# Altium PCB staircase PCB1.PcbDoc
Units mm, origin at the board's own origin, x right, y up, seen from the top; angles counter-clockwise.
Board outline 126.7 x 65 mm, 2 copper layers (Top Layer, Bottom Layer); 78 components, 76 nets, 222 pads, 2 vias.
Unrouted connection lines stored in the file: 1.
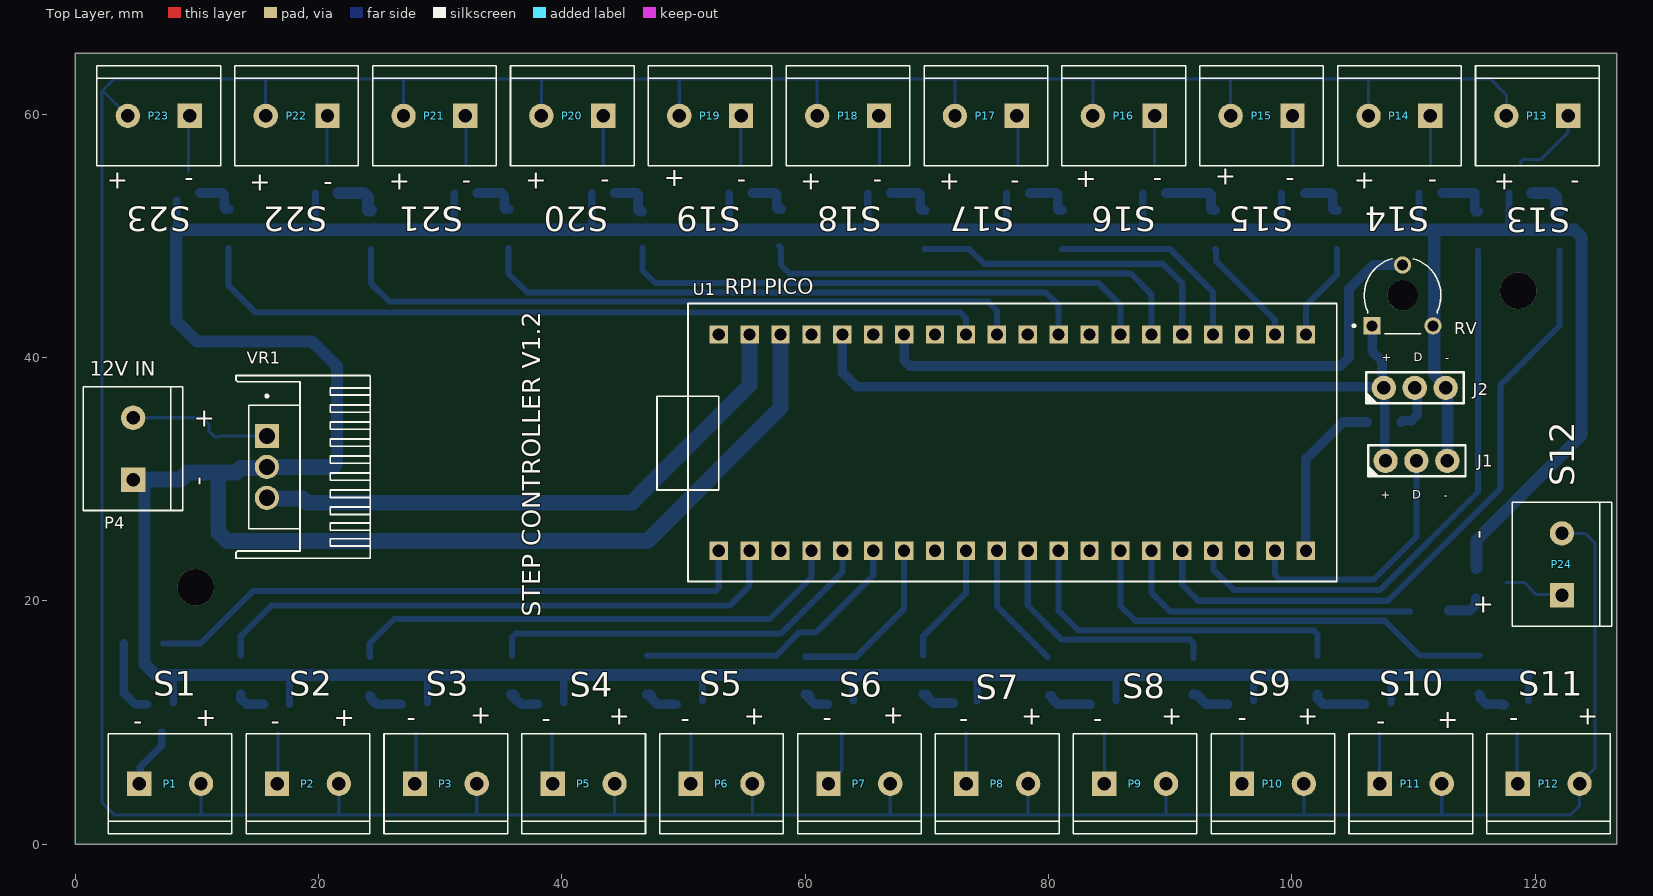
[diagram p0: Top Layer view]
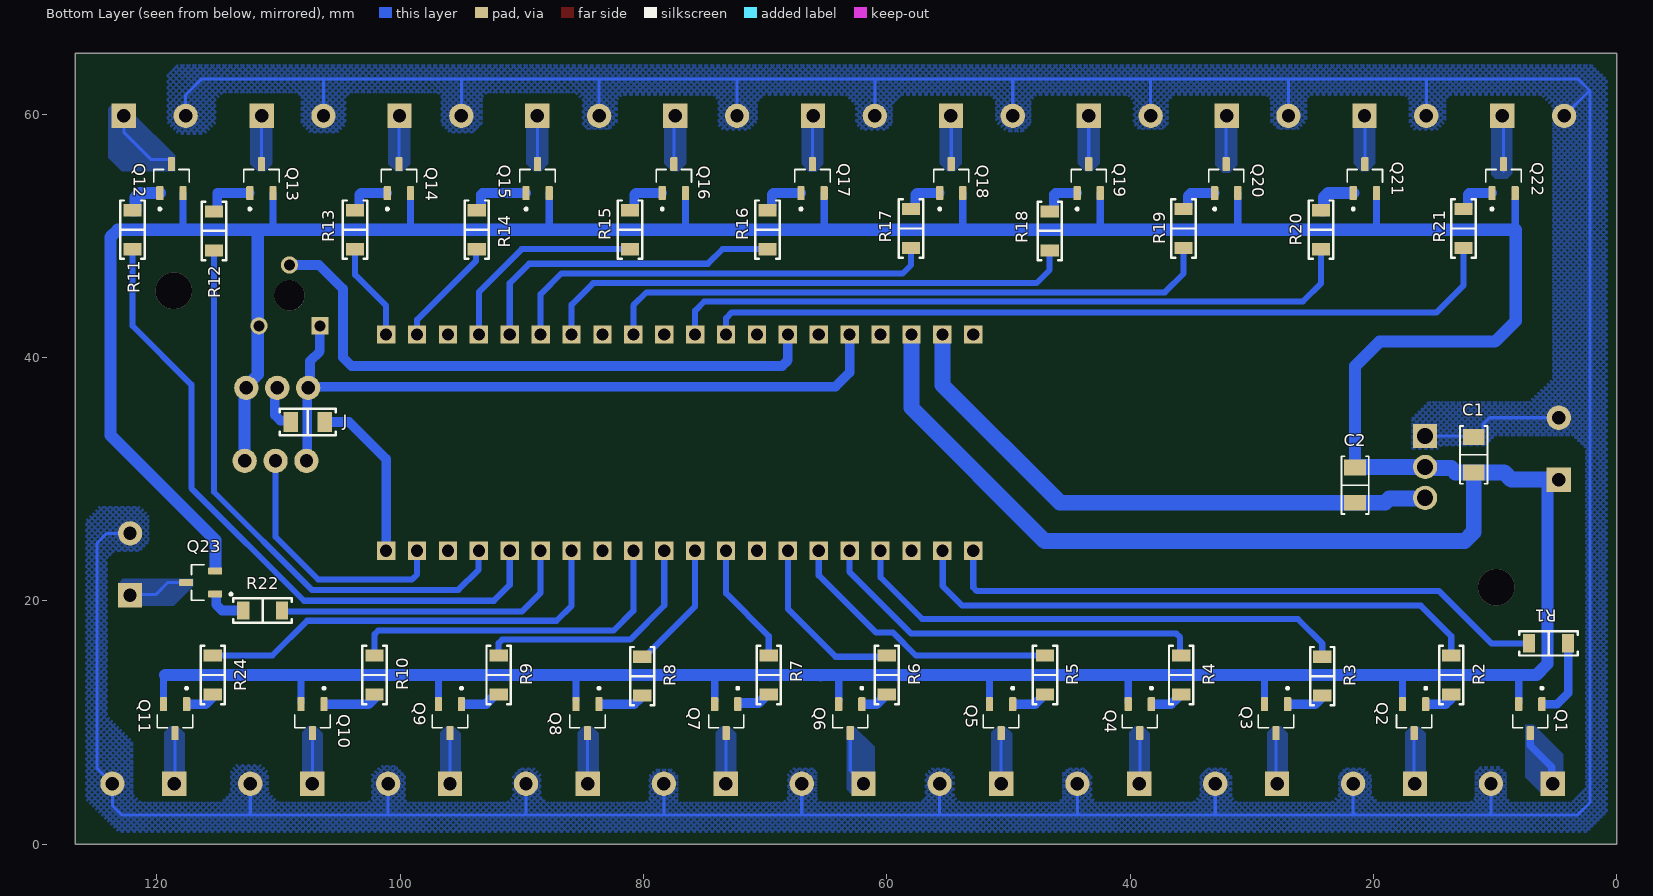
[diagram p1: Bottom Layer view, seen from below]
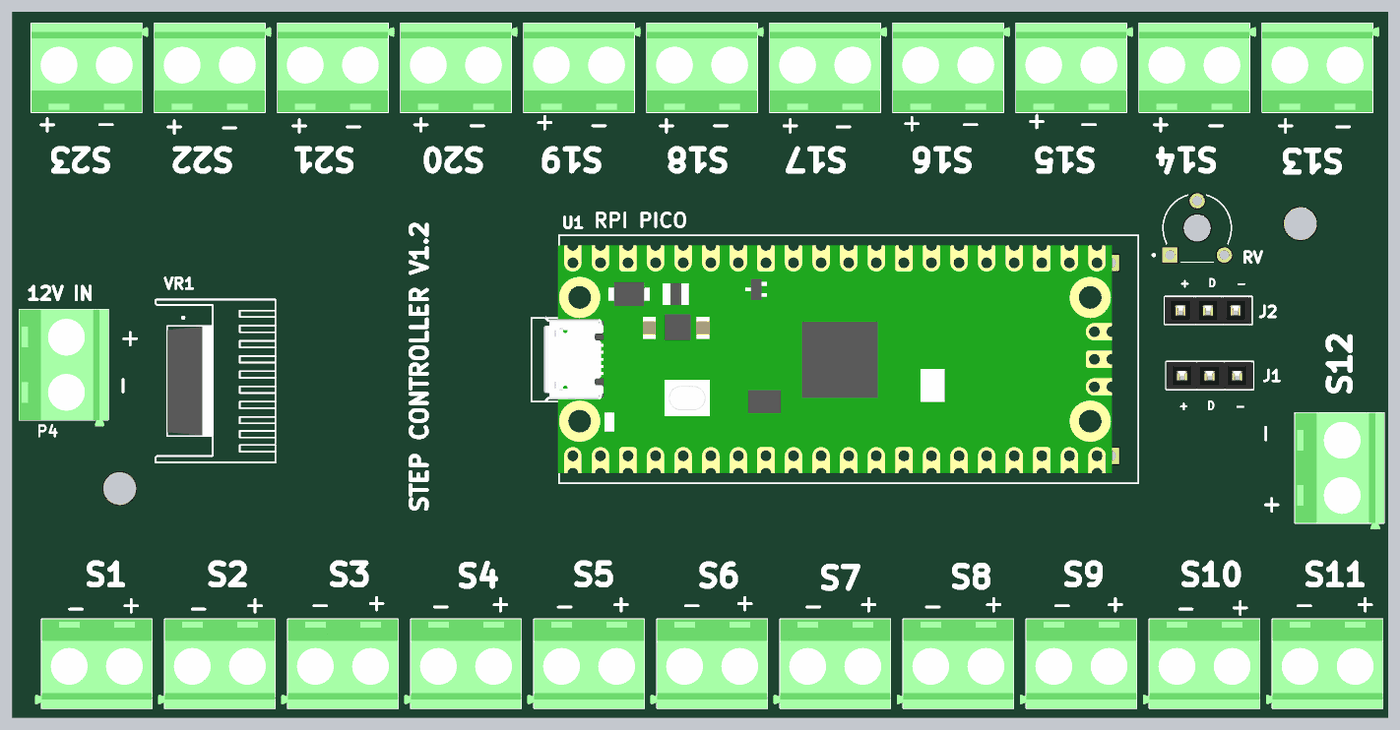
[diagram p2: 3D render of the assembled board from above, using the file's embedded part models]
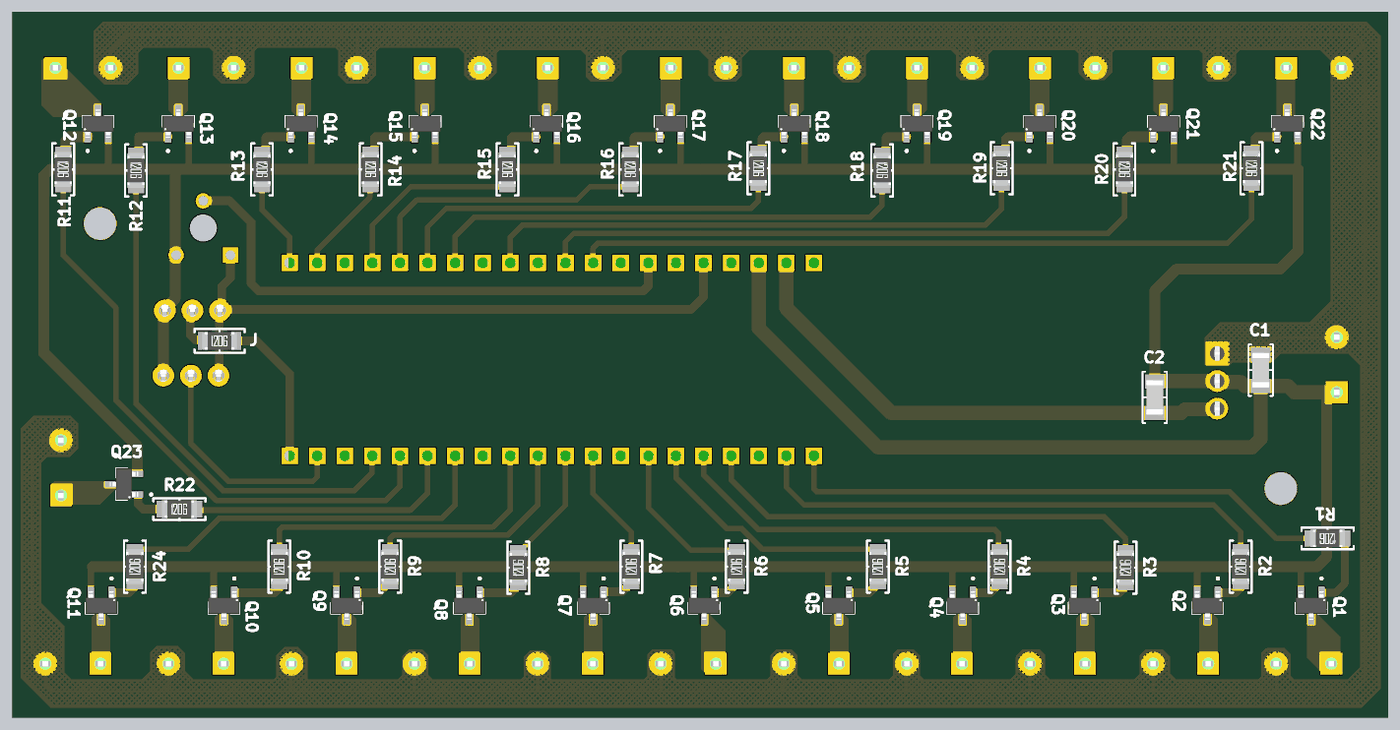
[diagram p3: 3D render of the assembled board from below, using the file's embedded part models]

## Layer stack, top to bottom
Top Solder: solder mask 0.0102, Solder Resist, Dk 3.5
Top Layer: signal copper 0.0356
Dielectric 1: dielectric 0.32, FR-4, Dk 4.8
Bottom Layer: signal copper 0.0356
Bottom Solder: solder mask 0.0102, Solder Resist, Dk 3.5

## Board outline
0,0 126.7,0 126.7,65 0,65

## Design rules (kind name [scope] priority, off if disabled: settings)
Clearance [All] p1: gap=0.254 ignorepadtopadclearanceinfootprint=FALSE except(0: Arc-Hole Track-Hole SMDPad-Hole THPad-Hole Via-Hole Fill-Hole Poly-Hole Region-Hole Text-Hole)
PolygonConnect [All] p1: connectstyle=Relief reliefconductorwidth=0.254 reliefentries=4 polygonreliefangle="90 Angle" airgapwidth=0.254
RoutingVias [All] p1: holewidth=0.711 width=1.27 viastyle="Through Hole" minholewidth=0.711 minwidth=1.27 maxholewidth=0.711 maxwidth=1.27
SolderMaskExpansion [All] p1: expansion=0.102 istentingtop=FALSE
Width [All] p1: maxlimit=10 minlimit=0.254 preferedwidth=0.254
30 further rules are at their usual default settings.

## Components (designator, comment, footprint, x,y, rotation, side; value= is the part's Value field where it differs from the comment)
C1 "0.33 µF" "CAP 1206_3216 - 0.8MM" 11.75,32 r90 bottom
C2 "100pF" "CAP 1206_3216 - 0.8MM" 21.5,29.5 r90 bottom
J "Comment" "RES 1206_3216" 107.6,34.7 r180 bottom
J1 "PIR SENS" "HARWIN M20-7820345" 110.24,31.5 r90 top
J2 "PIR SENS" "HARWIN M20-7820345" 110.1,37.5 r90 top
P1 "282837-2" TE_282837-2 7.793,4.959 r0 top
P2 "282837-2" TE_282837-2 19.125,4.959 r0 top
P3 "282837-2" TE_282837-2 30.456,4.959 r0 top
P4 "12V IN" TE_282837-2 4.75,32.5 r90 top
P5 "282837-2" TE_282837-2 41.788,4.959 r0 top
P6 "282837-2" TE_282837-2 53.119,4.959 r0 top
P7 "282837-2" TE_282837-2 64.451,4.959 r0 top
P8 "282837-2" TE_282837-2 75.782,4.959 r0 top
P9 "282837-2" TE_282837-2 87.114,4.959 r0 top
P10 "282837-2" TE_282837-2 98.445,4.959 r0 top
P11 "282837-2" TE_282837-2 109.777,4.959 r0 top
P12 "282837-2" TE_282837-2 121.108,4.959 r0 top
P13 "282837-2" TE_282837-2 120.173,59.859 r180 top
P14 "282837-2" TE_282837-2 108.842,59.859 r180 top
P15 "282837-2" TE_282837-2 97.51,59.859 r180 top
P16 "282837-2" TE_282837-2 86.179,59.859 r180 top
P17 "282837-2" TE_282837-2 74.847,59.859 r180 top
P18 "282837-2" TE_282837-2 63.516,59.859 r180 top
P19 "282837-2" TE_282837-2 52.184,59.859 r180 top
P20 "282837-2" TE_282837-2 40.853,59.859 r180 top
P21 "282837-2" TE_282837-2 29.521,59.859 r180 top
P22 "282837-2" TE_282837-2 18.19,59.859 r180 top
P23 "282837-2" TE_282837-2 6.858,59.859 r180 top
P24 "282837-2" TE_282837-2 122.2,23 r90 top
Q1 "AO3400-5.8A" SOT95P260X140-3N 7.1,10.31 r270 bottom
Q2 "AO3400-5.8A" SOT95P260X140-3N 16.65,10.31 r270 bottom
Q3 "AO3400-5.8A" SOT95P260X140-3N 28,10.31 r270 bottom
Q4 "AO3400-5.8A" SOT95P260X140-3N 39.2,10.31 r270 bottom
Q5 "AO3400-5.8A" SOT95P260X140-3N 50.6,10.31 r270 bottom
Q6 "AO3400-5.8A" SOT95P260X140-3N 63,10.31 r270 bottom
Q7 "AO3400-5.8A" SOT95P260X140-3N 73.2,10.31 r270 bottom
Q8 "AO3400-5.8A" SOT95P260X140-3N 84.6,10.31 r270 bottom
Q9 "AO3400-5.8A" SOT95P260X140-3N 95.9,10.31 r270 bottom
Q10 "AO3400-5.8A" SOT95P260X140-3N 107.2,10.31 r270 bottom
Q11 "AO3400-5.8A" SOT95P260X140-3N 118.5,10.31 r270 bottom
Q12 "AO3400-5.8A" SOT95P260X140-3N 118.8,54.7 r90 bottom
Q13 "AO3400-5.8A" SOT95P260X140-3N 111.4,54.7 r90 bottom
Q14 "AO3400-5.8A" SOT95P260X140-3N 100.1,54.7 r90 bottom
Q15 "AO3400-5.8A" SOT95P260X140-3N 88.7,54.7 r90 bottom
Q16 "AO3400-5.8A" SOT95P260X140-3N 77.5,54.7 r90 bottom
Q17 "AO3400-5.8A" SOT95P260X140-3N 66.1,54.7 r90 bottom
Q18 "AO3400-5.8A" SOT95P260X140-3N 54.7,54.7 r90 bottom
Q19 "AO3400-5.8A" SOT95P260X140-3N 43.4,54.7 r90 bottom
Q20 "AO3400-5.8A" SOT95P260X140-3N 32.1,54.7 r90 bottom
Q21 "AO3400-5.8A" SOT95P260X140-3N 20.7,54.7 r90 bottom
Q22 "AO3400-5.8A" SOT95P260X140-3N 9.3,54.7 r90 bottom
Q23 "AO3400-5.8A" SOT95P260X140-3N 116.4,21.5 r0 bottom
R1 "220 Ohms" "YAGEO RES 1206_3216" 5.6,16.5 r0 bottom
R2 "220 Ohms" "YAGEO RES 1206_3216" 13.6,13.9 r90 bottom
R3 "220 Ohms" "YAGEO RES 1206_3216" 24.2,13.8 r90 bottom
R4 "220 Ohms" "YAGEO RES 1206_3216" 35.8,13.9 r90 bottom
R5 "220 Ohms" "YAGEO RES 1206_3216" 47,13.9 r90 bottom
R6 "220 Ohms" "YAGEO RES 1206_3216" 60,13.9 r90 bottom
R7 "220 Ohms" "YAGEO RES 1206_3216" 69.7,13.9 r90 bottom
R8 "220 Ohms" "YAGEO RES 1206_3216" 80.1,13.8 r90 bottom
R9 "220 Ohms" "YAGEO RES 1206_3216" 91.9,13.9 r90 bottom
R10 "220 Ohms" "YAGEO RES 1206_3216" 102.1,13.9 r90 bottom
R11 "220 Ohms" "YAGEO RES 1206_3216" 122,50.5 r270 bottom
R12 "220 Ohms" "YAGEO RES 1206_3216" 115.3,50.4 r270 bottom
R13 "220 Ohms" "YAGEO RES 1206_3216" 103.7,50.5 r270 bottom
R14 "220 Ohms" "YAGEO RES 1206_3216" 93.7,50.5 r270 bottom
R15 "220 Ohms" "YAGEO RES 1206_3216" 81.1,50.5 r270 bottom
R16 "220 Ohms" "YAGEO RES 1206_3216" 69.8,50.5 r270 bottom
R17 "220 Ohms" "YAGEO RES 1206_3216" 58,50.6 r270 bottom
R18 "220 Ohms" "YAGEO RES 1206_3216" 46.6,50.4 r270 bottom
R19 "220 Ohms" "YAGEO RES 1206_3216" 35.6,50.6 r270 bottom
R20 "220 Ohms" "YAGEO RES 1206_3216" 24.3,50.5 r270 bottom
R21 "220 Ohms" "YAGEO RES 1206_3216" 12.6,50.6 r270 bottom
R22 "220 Ohms" "YAGEO RES 1206_3216" 111.3,19.2 r180 bottom
R24 "220 Ohms" "YAGEO RES 1206_3216" 115.4,13.9 r90 bottom
RV "10K" TRIM_PTN06-D02CB20 109.1,45.1 r0 top
U1 "RASPBERRY_PI_PICO" RASPBERRY_PI_PICO 75.75,33 r90 top
VR1 "L7805" TO255P1020X450X2000-3 15.75,31 r270 top

## Footprints (in the part's own frame and the unit in brackets; to place one, negate y for a bottom-side part, rotate by r counter-clockwise, add the part's x,y. Pads: shape width x height; smd on the part's side, far side on the other; paste and mask are expansions set on the pad)
"CAP 1206_3216 - 0.8MM" [mm] "Chip Capacitor, 2-Leads, Body 3.25x1.60mm, IPC Medium Density"
  rect 1.3x1.8 smd: 1(-1.45,0) 2(1.45,0)
  silkscreen extent -2.37,-1.13 2.38,1.12, body extent -1.6,-0.8 1.6,0.8, height 0.8
"HARWIN M20-7820345" [mm] "2.54mm DIL PC TAIL PIN HEADER ASSEMBLY"
  round 2 hole 1.1: 1(0,2.54) 2(0,0) 3(0,-2.54)
  silkscreen extent -1.27,-4.03 1.27,4, body extent -1.25,-4.01 1.25,4.01, height 8.5
RASPBERRY_PI_PICO [mm]
  rect 1.508x1.508 / inner round 1.508 / far side rect 1.508x1.508 hole 1: 3V3(8.89,12.7) 3V3_EN(8.89,15.24) ADC_VREF(8.89,10.16) AGND(8.89,5.08) GND(8.89,17.78) GND2(8.89,-7.62) GND3(8.89,-20.32) GND4(-8.89,17.78) GND5(-8.89,5.08) GND6(-8.89,-7.62) GND7(-8.89,-20.32) GP0(-8.89,22.86) GP1(-8.89,20.32) GP2(-8.89,15.24) GP3(-8.89,12.7) GP4(-8.89,10.16) GP5(-8.89,7.62) GP6(-8.89,2.54) GP7(-8.89,0) GP8(-8.89,-2.54) GP9(-8.89,-5.08) GP10(-8.89,-10.16) GP11(-8.89,-12.7) GP12(-8.89,-15.24) GP13(-8.89,-17.78) GP14(-8.89,-22.86) GP15(-8.89,-25.4) GP16(8.89,-25.4) GP17(8.89,-22.86) GP18(8.89,-17.78) GP19(8.89,-15.24) GP20(8.89,-12.7) GP21(8.89,-10.16) GP22(8.89,-5.08) GP26_A0(8.89,0) GP27_A1(8.89,2.54) GP28_A2(8.89,7.62) RUN(8.89,-2.54) VBUS(8.89,22.86) VSYS(8.89,20.32)
  silkscreen extent -11.43,-27.94 11.43,27.94, body extent -10.5,-25.5 10.5,26.8, height 3.73
"RES 1206_3216" [mm] "Chip Resistor, 2-Leads, Body 3.13x1.55mm, IPC Medium Density"
  rect 1.2x1.65 smd: 1(-1.4,0) 2(1.4,0)
  silkscreen extent -2.3,-1.1 2.3,1.1, body extent -1.6,-0.8 1.6,0.8, height 0.6
SOT95P260X140-3N [mm]
  rrect25% 1.14x0.6 smd: 1(-1.19,0.95) 2(-1.19,-0.95) 3(1.19,0)
  silkscreen extent -2.6,-1.45 0.75,1.45, body extent -1.3,-1.45 1.3,1.45, height 1.4
TE_282837-2 [mm]
  rect 2x2 hole 1.1: 1(-2.54,0)
  round 2 hole 1.1: 2(2.54,0)
  silkscreen extent -5.08,-4.1 5.08,4.1, body extent -5.68,-4.1 5.08,4.1, height 10
TO255P1020X450X2000-3 [mm]
  rect 1.995x1.995 hole 1.33: 1(-2.54,0)
  round 1.995 hole 1.33: 2(0,0) 3(2.54,0)
  silkscreen extent -7.53,-2.55 7.5,8.5, body extent -5.08,-1.47 5.08,2.72, height 22.86
TRIM_PTN06-D02CB20 [mm]
  rect 1.408x1.408 hole 0.9: 1(-2.5,-2.5)
  round 1.408 hole 0.9: 2(0,2.5) 3(2.5,-2.5)
  round 2.5 hole 2.5 unplated: ""(0,0)
  silkscreen extent -4.1,-3.15 3.15,3.03
"YAGEO RES 1206_3216" [mm] "Chip Resistor, 2-Leads, Body 3.13x1.55mm"
  rect 1x1.5 smd: 1(-1.6,0) 2(1.6,0)
  silkscreen extent -2.4,-1 2.4,1, body extent -1.6,-0.8 1.6,0.8, height 0.6

## Part data
C1: library part CC1206JKX7R8BB334, "CAP CER 0.33UF 25V X7R 1206", Device Package="1206 (3216 Metric)", Manufacturer=Yageo, Operating Temperature="-55°C ~ 125°C", Supplier Part Number 1=13-CC1206JKX7R8BB334CT-ND, Temperature Coefficient=X7R, Tolerance=±5%, Voltage - Rated=25V, Applications="General Purpose", Capacitance="0.33 µF", ComponentLink1Description=Datasheet, ComponentLink1URL=https://www.yageo.com/upload/media/product/app/datasheet/mlcc/upy-gphc_x7r_6_3v-to-250v.pdf, ComponentLink2Description="DigiKey Link", ComponentLink2URL=https://www.digikey.com/en/products/detail/yageo/CC1206JKX7R8BB334/5884429, Features="High Voltage", LastUpdated="04-06-2024 19:09:58", Lifecycle Status=Active, Minimum Order=1, Mounting Type="Surface Mount, MLCC", Package / Case="1206 (3216 Metric)", Packaging=TapeAndReel, Part Number=CC1206JKX7R8BB334, PartId=59979, Price=0.05, Series=CC, Size / Dimension="0.126\" L x 0.063\" W (3.20mm x 1.60mm)", Supplier 1=DigiKey, Thickness (Max)="0.037\" (0.95mm)"
C2: library part MM061A101JCT2A, "CAP CER 100PF 100V C0G/NP0 1206", Device Package="1206 (3216 Metric)", Manufacturer="AVX Corporation", Operating Temperature="-55°C ~ 125°C", Supplier Part Number 1=478-10622-1-ND, Temperature Coefficient="C0G, NP0", Tolerance=±5%, Voltage - Rated=100V, Applications="Medical, Non-Critical", Capacitance=100pF, ComponentLink1Description=Datasheet, ComponentLink1URL=http://datasheets.avx.com/AVX-MM.pdf, ComponentLink2Description="DigiKey Link", ComponentLink2URL=http://digikey.com/product-detail/en/avx-corporation/MM061A101JCT2A/478-10622-1-ND/7344883, LastUpdated="02-09-2020 01:04:46", Lifecycle Status=Active, Minimum Order=1, Mounting Type="Surface Mount, MLCC", Package / Case="1206 (3216 Metric)", Packaging=TapeAndReel, Part Number=MM061A101JCT2A, Part Status=Active, PartId=18685, Price=0.52, Series=MM, Size / Dimension="0.126\" L x 0.063\" W (3.20mm x 1.60mm)", Supplier 1=DigiKey, Thickness (Max)="0.029\" (0.74mm)"
J1 J2: library part M20-7820342, "CONN RCPT 3POS 0.1 GOLD PCB", Current Rating (Amps)=3A, Insulation Color=Black, Manufacturer="Harwin Inc.", Material Flammability Rating="UL94 V-0", Operating Temperature="-40°C ~ 105°C", Supplier Part Number 1=952-1783-ND, ComponentLink1Description=Datasheet, ComponentLink1URL=https://cdn.harwin.com/pdfs/Harwin_PC_Connectors_M20.pdf, ComponentLink2Description="DigiKey Link", ComponentLink2URL=https://www.digikey.com/en/products/detail/harwin-inc/M20-7820342/3727752, Connector Type=Receptacle, Contact Finish - Mating=Gold, Contact Finish - Post=Tin, Contact Finish Thickness - Mating=Flash, Contact Length - Post="0.118\" (3.00mm)", Contact Type="Female Socket", Fastening Type=Push-Pull, Insulation Height="0.335\" (8.51mm)", LastUpdated="21-09-2022 18:55:13", Lifecycle Status=Active, Mated Stacking Heights="11.04mm, 12.63mm", Minimum Order=1, Mounting Type="Through Hole", Number of Positions=3, Number of Positions Loaded=All, Number of Rows=1, Packaging=Tube, Part Number=M20-7820342, Part Status=Active, Pitch - Mating="0.100\" (2.54mm)", Price=0.42, Series=M20, Style="Board to Board or Cable", Supplier 1=DigiKey, Termination=Solder
P1 P2 P3 P5 P6 P7 P8 P9 P10 P11 P12 P13 P14 P15 P16 P17 P18 P19 P20 P21 P22 P23 P24: "Ð Ð°Ð·ÑŠÐµÐ¼Ð½Ñ‹Ðµ ÐºÐ»ÐµÐ¼Ð¼Ð½Ñ‹Ðµ ÐºÐ¾Ð»Ð¾Ð´ÐºÐ¸ Ð Ð¾Ð·ÐµÑ‚ÐºÐ° 2 Ð¿Ð¾Ð»Ð¾Ð¶ÐµÐ½Ð¸Ñ 5,08 Ð¼Ð¼ ÐŸÑ€Ð¸Ð¿Ð¾Ð¹ Ð¿Ñ€ÑÐ¼Ð¾Ð¹ Ñ‡ÐµÑ€ÐµÐ· Ð¾Ñ‚Ð²ÐµÑ€ÑÑ‚Ð¸Ðµ 13,5 Ð / ÐºÐ¾Ð½Ñ‚Ð°ÐºÑ‚", Package=None, Availability="In Stock", Check_prices=https://www.snapeda.com/parts/282837-2/TE+Connectivity+AMP+Connectors/view-part/?ref=eda, MF="TE Connectivity", MP=282837-2, Price=None, Purchase-URL=https://pricing.snapeda.com/search/part/282837-2/?ref=eda, SnapEDA_Link=https://www.snapeda.com/parts/282837-2/TE+Connectivity+AMP+Connectors/view-part/?ref=snap
P4: library part 282837-2, "Ð Ð°Ð·ÑŠÐµÐ¼Ð½Ñ‹Ðµ ÐºÐ»ÐµÐ¼Ð¼Ð½Ñ‹Ðµ ÐºÐ¾Ð»Ð¾Ð´ÐºÐ¸ Ð Ð¾Ð·ÐµÑ‚ÐºÐ° 2 Ð¿Ð¾Ð»Ð¾Ð¶ÐµÐ½Ð¸Ñ 5,08 Ð¼Ð¼ ÐŸÑ€Ð¸Ð¿Ð¾Ð¹ Ð¿Ñ€ÑÐ¼Ð¾Ð¹ Ñ‡ÐµÑ€ÐµÐ· Ð¾Ñ‚Ð²ÐµÑ€ÑÑ‚Ð¸Ðµ 13,5 Ð / ÐºÐ¾Ð½Ñ‚Ð°ÐºÑ‚", Package=None, Availability="In Stock", Check_prices=https://www.snapeda.com/parts/282837-2/TE+Connectivity+AMP+Connectors/view-part/?ref=eda, MF="TE Connectivity", MP=282837-2, Price=None, Purchase-URL=https://pricing.snapeda.com/search/part/282837-2/?ref=eda, SnapEDA_Link=https://www.snapeda.com/parts/282837-2/TE+Connectivity+AMP+Connectors/view-part/?ref=snap
Q1 Q2 Q3 Q4 Q5 Q6 Q7 Q8 Q9 Q10 Q11 Q12 Q13 Q14 Q15 Q16 Q17 Q18 Q19 Q20 Q21 Q22 Q23: "N-Channel 30 V 5.8A (Ta) 1.5W (Ta) Surface Mount SOT-23", Package=None, Availability="In Stock", Check_prices=https://www.snapeda.com/parts/AO3400-5.8A/MDD/view-part/?ref=eda, MF=MDD, MP=AO3400-5.8A, Price=None, Purchase-URL=https://pricing.snapeda.com/search/part/AO3400-5.8A/?ref=eda, SnapEDA_Link=https://www.snapeda.com/parts/AO3400-5.8A/MDD/view-part/?ref=snap
R1 R2 R3 R4 R5 R6 R7 R8 R9 R10 R11 R12 R13 R14 R15 R16 R17 R18 R19 R20 R21 R22 R24: library part AC1206JR-07220RL, "RES SMD 220 OHM 5% 1/4W 1206", Device Package="1206 (3216 Metric)", Manufacturer=Yageo, Operating Temperature="-55°C ~ 155°C", Power (Watts)="0.25W, 1/4W", Ratings=AEC-Q200, Supplier Device Package=1206, Supplier Part Number 1=YAG3937CT-ND, Temperature Coefficient=±100ppm/°C, Tolerance=±5%, ComponentLink1Description=Datasheet, ComponentLink1URL=https://www.yageo.com/upload/media/product/productsearch/datasheet/rchip/PYu-AC_51_RoHS_L_7.pdf, ComponentLink2Description="DigiKey Link", ComponentLink2URL=https://www.digikey.com/en/products/detail/yageo/AC1206JR-07220RL/5897808, Composition="Thick Film", Features="Automotive AEC-Q200, Moisture Resistant", Height - Seated (Max)="0.026\" (0.65mm)", LastUpdated="25-07-2024 09:21:37", Lifecycle Status=Active, Minimum Order=1, Number of Terminations=2, Package / Case="1206 (3216 Metric)", Packaging=TapeAndReel, Part Number=AC1206JR-07220RL, Part Status=Active, PartId=27518, Price=0.01, Resistance="220 Ohms", Series=AC, Size / Dimension="0.122\" L x 0.063\" W (3.10mm x 1.60mm)", Supplier 1=DigiKey
RV: library part PTN06-D02CB20, Package=None, Availability=Unavailable, MP=PTN06-D02CB20, Price=None
U1: "Raspberry Pi Board, Arm Cortex-M0+; Core Architecture:Arm; Core Sub-Architecture:Cortex-M0+; Kit Contents:Raspberry Pi Pico Board; No. Of Bits:32Bit; Silicon Core Number:Rp2040; Silicon Manufacturer:Raspberry Pi", Package=None, Check_prices=https://www.snapeda.com/parts/RASPBERRY%20PI%20PICO/Raspberry+Pi/view-part/?ref=eda, MF="Raspberry Pi", MP="RASPBERRY PI PICO", SnapEDA_Link=https://www.snapeda.com/parts/RASPBERRY%20PI%20PICO/Raspberry+Pi/view-part/?ref=snap
VR1: "Standard Regulator Pos 5V 1.5A 3-Pin(3+Tab) TO-220FP Tube", Package=None, Availability="Not in stock", Check_prices=https://www.snapeda.com/parts/L7805/STMicroelectronics/view-part/?ref=eda, MF=STMicroelectronics, MP=L7805, Price=None, SnapEDA_Link=https://www.snapeda.com/parts/L7805/STMicroelectronics/view-part/?ref=snap

## Via types
v1: diameter 3, hole 3, Top Layer to Bottom Layer, 2 vias

## Nets (pads, with @x,y where several pads share a name; then routed paths per layer and width w, separated by ;. In a path a pad name is that pad's centre, name@x,y a point inside that pad or via, vN(x,y) a via of type N, cw(c..) or ccw(c..) an arc to the next point about the centre after c; other vN are vias at no path point)
3V3: J1.1 J2.1 RV.1 U1.3V3 | length 59.6
  Bottom Layer w0.8: U1.3V3 63.05,38.75 64.2,37.6 J2.1@107.46,37.6 ; RV.1 106.6,40.5 107.4,39.7 107.4,37.66 J2.1@107.46,37.6 ; J1.1 107.63,31.57 107.63,37.43 J2.1 J2.1@107.46,37.6
GND: C1.1 C2.2 J1.3 J2.3 P4.1 Q1.2 Q2.2 Q3.2 Q4.2 Q5.2 Q6.2 Q7.2 Q8.2 Q9.2 Q10.2 Q11.2 Q12.2 Q13.2 Q14.2 Q15.2 Q16.2 Q17.2 Q18.2 Q19.2 Q20.2 Q21.2 Q22.2 Q23.2 RV.3 U1.GND VR1.2 | length 464.9
  Bottom Layer w0.5: 19.7,50.5 19.75,50.55
  Bottom Layer w0.6: 8,13.9 8.05,13.85 Q1.2@8.05,11.59 ; 8.3,50.5 8.35,50.55 8.35,52.91 ; 17.3,13.9 17.6,13.6 Q2.2 ; 18.7,13.9 18.75,13.85 ; 19.75,50.55 Q21.2 ; 20.45,50.55 20.5,50.5 ; 28.8,13.9 28.95,13.75 Q3.2@28.95,11.59 ; 30.4,13.9 30.55,13.75 ; 31.1,50.5 31.15,50.55 Q20.2 ; 32.1,50.5 32.2,50.6 ; 40.1,13.9 40.15,13.85 Q4.2@40.15,11.59 ; 42.25,13.85 42.3,13.9 ; 42.4,50.5 42.45,50.55 Q19.2 ; Q5.2@51.55,11.79 51.55,13.75 51.7,13.9 ; 53.7,50.496 53.75,50.546 Q18.2 ; 53.75,13.85 53.8,13.9 ; 55.15,50.546 55.2,50.496 ; 63.9,13.9 63.95,13.85 Q6.2@63.95,11.79 ; 65.1,50.496 65.15,50.546 Q17.2 ; 65.45,13.65 65.7,13.9 ; 66.9,50.496 66.95,50.546 ; Q7.2@74.15,11.79 74.15,13.85 74.2,13.9 ; 76.4,13.9 76.55,13.75 ; 76.5,50.496 76.55,50.546 Q16.2 ; 78,50.496 78.15,50.646 ; 85.5,13.9 85.55,13.85 Q8.2@85.55,11.79 ; Q15.2 87.75,50.746 88,50.496 ; 87.95,13.85 88,13.9 ; 90.6,50.496 90.65,50.546 ; 96.8,13.9 96.85,13.85 Q9.2@96.85,11.79 ; Q14.2 99.15,50.546 99.2,50.496 ; 100.7,13.9 100.75,13.85 ; 102.4,50.496 102.45,50.546 ; Q10.2@108.15,11.59 108.15,13.85 108.2,13.9 ; Q13.2 110.45,50.646 110.6,50.496 ; 111.55,13.85 111.6,13.9 ; 113.596,50.496 113.746,50.646 ; 117.8,50.496 117.85,50.546 Q12.2 ; 119.3,13.9 119.45,13.75 Q11.2@119.45,11.79 ; 123.1,50.496 123.15,50.546
  Bottom Layer w0.8: P4.1@5.7,29.66 6,29.96 ; C2.2@21.2,31 21.3,31 C2.2@21.5,31.2 ; 21.9,13.9 22.015,13.785 ; 48.668,50.5 48.672,50.496 ; 115.4,13.9 115.467,13.833
  Bottom Layer w1: P4.1@5.7,29.66 5.7,14.8 6.6,13.9 8,13.9 17.3,13.9 18.7,13.9 21.9,13.9 28.8,13.9 30.4,13.9 40.1,13.9 42.3,13.9 51.7,13.9 53.8,13.9 63.9,13.9 65.7,13.9 74.2,13.9 76.4,13.9 85.5,13.9 88,13.9 96.8,13.9 100.7,13.9 108.2,13.9 111.6,13.9 115.4,13.9 119.3,13.9 ; C2.2@21.5,31.2 21.5,39.3 19.5,41.3 10,41.3 8.3,43 8.3,50.5 19.7,50.5 20.5,50.5 31.1,50.5 32.1,50.5 42.4,50.5 48.668,50.5 ; 48.672,50.496 53.7,50.496 55.2,50.496 65.1,50.496 66.9,50.496 76.5,50.496 78,50.496 88,50.496 90.6,50.496 99.2,50.496 102.4,50.496 110.6,50.496 111.7,50.496 ; J2.3 112.64,37.646 111.7,38.586 111.7,42.212 111.678,42.233 111.678,42.578 111.7,42.6 111.678,42.622 111.678,42.967 111.7,42.988 111.7,50.496 ; J1.3 J2.3@112.78,37.5 ; Q23.2@115.18,22.7 115.18,24.98 123.8,33.6 123.8,49.91 123.214,50.496 123.1,50.496 117.8,50.496 113.596,50.496 111.7,50.496
  Bottom Layer w1.3: P4.1 6,29.96 8.66,29.96 9.25,30.55 C1.1 ; C2.2@21.2,31 VR1.2 15.65,30.9 13.6,30.9 13.25,30.55 C1.1 ; U1.GND 57.97,35.87 47,24.9 12.512,24.9 11.75,25.662 C1.1
L1: R1.2 U1.GP0 | length 50.6
  Bottom Layer w0.5: R1.2 10.3,16.5 14.6,20.8 52.597,20.8 52.89,21.093 U1.GP0
L2: R2.2 U1.GP1 | length 48
  Bottom Layer w0.5: R2.2 13.6,17.1 16.1,19.6 53.8,19.6 55.4,21.2 55.4,24.08 U1.GP1
L3: R3.2 U1.GP2 | length 41.9
  Bottom Layer w0.5: R3.2 24.2,16.5 26.2,18.5 57.1,18.5 60.51,21.91 U1.GP2
L4: R4.2 U1.GP3 | length 32.6
  Bottom Layer w0.5: R4.2@35.885,15.5 35.885,16.985 36.2,17.3 58,17.3 63.05,22.35 U1.GP3
L5: R5.2 U1.GP4 | length 23.3
  Bottom Layer w0.5: R5.2 57.6,15.5 59.5,17.4 60.9,17.4 65.59,22.09 U1.GP4
L6: R6.2 U1.GP5 | length 14.5
  Bottom Layer w0.5: R6.2@60,15.4 64.2,15.4 68.13,19.33 U1.GP5
L7: R7.2 U1.GP6 | length 10.1
  Bottom Layer w0.5: R7.2 69.7,17.1 73.21,20.61 U1.GP6
L8: R8.2 U1.GP7 | length 10.4
  Bottom Layer w0.5: U1.GP7 75.75,19.55 R8.2@79.9,15.4
L9: R9.2 U1.GP8 | length 20.6
  Bottom Layer w0.5: U1.GP8 78.29,19.61 81.1,16.8 91.607,16.8 91.9,16.507 R9.2 R9.2@91.9,15.301
L10: R10.2 U1.GP9 | length 28.8
  Bottom Layer w0.5: U1.GP9 80.83,19.17 82.446,17.554 101.807,17.554 102.1,17.261 R10.2 R10.2@102.1,15.447
L11: R24.2 U1.GP10 | length 35.7
  Bottom Layer w0.5: U1.GP10 85.91,19.59 87.146,18.354 89.68,18.354 107.646,18.354 110.5,15.5 R24.2
L12: R22.2 U1.GP11 | length 25.3
  Bottom Layer w0.5: U1.GP11 88.45,20.65 89.992,19.108 R22.2@109.7,19.108
L13: R11.2 U1.GP12 | length 54.9
  Bottom Layer w0.5: U1.GP12 90.99,21.31 92.3,20 107.9,20 117.154,29.254 117.154,37.754 122,42.6 R11.2@122,48.801
L14: R13.2 U1.GP16 | length 8.1
  Bottom Layer w0.5: U1.GP16 101.15,44.25 103.7,46.8 R13.2
L15: R14.2 U1.GP17 | length 9
  Bottom Layer w0.5: R14.2 93.757,48.843 93.757,47.943 98.599,43.101 98.599,41.901 U1.GP17
L16: R15.2 U1.GP18 | length 17.4
  Bottom Layer w0.5: R15.2 90,48.9 93.53,45.37 U1.GP18
L17: R16.2 U1.GP19 | length 26.6
  Bottom Layer w0.5: R16.2 73.5,48.9 74.7,47.7 89.4,47.7 90.99,46.11 U1.GP19
L18: R17.2 U1.GP20 | length 36.4
  Bottom Layer w0.5: R17.2@57.828,49.172 57.938,49.055 ccw(c58.302,49.399) R17.2 58,47.6 58.7,46.9 86.75,46.9 88.45,45.2 U1.GP20
L19: R18.2 U1.GP21 | length 44.8
  Bottom Layer w0.5: R18.2@46.613,49.037 46.613,47.187 47.692,46.108 84.142,46.108 85.91,44.34 U1.GP21
L20: R19.2 U1.GP22 | length 50.8
  Bottom Layer w0.5: R19.2 35.6,46.9 37.146,45.354 79.75,45.354 80.83,44.274 U1.GP22
L21: R20.2 U1.GP26_A0 | length 57.1
  Bottom Layer w0.5: R20.2 24.3,46.1 25.8,44.6 75,44.6 75.75,43.85 U1.GP26_A0
L22: R21.2 U1.GP27_A1 | length 66.2
  Bottom Layer w0.5: R21.2 12.6,45.9 14.8,43.7 72.75,43.7 73.21,43.24 U1.GP27_A1
L23: R12.2 U1.GP13 | length 47.2
  Bottom Layer w0.5: U1.GP13 93.575,24.065 93.575,22.525 95.204,20.896 107.257,20.896 115.3,28.939 R12.2
NetC1_2: C1.2 P1.2 P2.2 P3.2 P4.2 P5.2 P6.2 P7.2 P8.2 P9.2 P10.2 P11.2 P12.2 P13.2 P14.2 P15.2 P16.2 P17.2 P18.2 P19.2 P20.2 P21.2 P22.2 P23.2 P24.2 VR1.1 | length 392.5
  Bottom Layer w0.254: P23.2 2.277,61.9 2.2,61.9 ; P4.2 10.46,35.04 10.977,34.523 10.977,33.973 11.5,33.45 C1.2 11.84,33.54 VR1.1 ; P1.2 10.333,2.567 10.5,2.4 ; P22.2 15.65,62.85 15.6,62.9 ; P2.2 21.665,2.565 21.5,2.4 ; P21.2 26.981,62.781 27.1,62.9 ; P3.2 32.996,2.496 32.9,2.4 ; P20.2 38.313,62.813 38.4,62.9 ; P5.2 44.328,2.528 44.2,2.4 ; P19.2 49.644,62.844 49.7,62.9 ; P6.2 55.659,2.441 55.7,2.4 ; P18.2 60.976,62.824 60.9,62.9 ; P7.2 66.991,2.509 67.1,2.4 ; P17.2 72.307,62.893 72.3,62.9 ; P8.2 78.322,2.422 78.3,2.4 ; P16.2 83.639,62.761 83.5,62.9 ; P9.2 89.654,2.546 89.8,2.4 ; P15.2 94.97,62.87 95,62.9 ; P10.2 100.985,2.415 101,2.4 ; P14.2 106.302,62.898 106.3,62.9 ; P11.2 112.317,2.483 112.4,2.4 ; P13.2 117.633,61.567 116.3,62.9 106.3,62.9 ; P24.2 124.111,25.54 124.9,24.751 124.9,6.211 P12.2 123.648,3.148 122.9,2.4 112.4,2.4 ; 2.2,61.9 2.2,3.4 3.2,2.4 10.5,2.4 ; 2.2,61.9 3.2,62.9 15.6,62.9 ; 10.5,2.4 21.5,2.4 ; 15.6,62.9 26.981,62.9 27.1,62.9 ; 21.5,2.4 32.9,2.4 ; 27.1,62.9 38.4,62.9 ; 32.9,2.4 32.996,2.4 44.2,2.4 ; 38.4,62.9 49.7,62.9 ; 44.2,2.4 55.7,2.4 ; 49.7,62.9 60.9,62.9 ; 55.7,2.4 66.991,2.4 67.1,2.4 ; 60.9,62.9 72.3,62.9 ; 67.1,2.4 78.3,2.4 ; 72.3,62.9 83.5,62.9 ; 78.3,2.4 89.8,2.4 ; 83.5,62.9 95,62.9 ; 89.8,2.4 101,2.4 ; 95,62.9 106.3,62.9 ; 101,2.4 112.4,2.4
NetC2_1: C2.1 U1.VSYS VR1.3 | length 48
  Bottom Layer w1.3: VR1.3 15.808,28.403 18.698,28.403 19.05,28.05 C2.1 45.75,28.05 55.43,37.73 U1.VSYS
NetJ1_2: J1.2 U1.GP14 | length 21.5
  Bottom Layer w0.5: U1.GP14 98.61,22.16 99.02,21.75 106.75,21.75 110.24,25.24 J1.2
NetJ2_2: J2.2 J.1 J.2 U1.GP15 | length 17.7
  Bottom Layer w0.8: U1.GP15 101.15,31.65 104.2,34.7 J.2 ; J.1 109.1,34.8 109.831,34.8 110.3,35.269 110.3,37.3 J2.2
NetP1_1: P1.1 Q1.3 | length 5
  Bottom Layer w0.6: P1.1 5.332,5.038 5.332,6.332 7.1,8.1 Q1.3@7.1,9.21
NetP2_1: P2.1 Q2.3 | length 4.2
  Bottom Layer w0.254: P2.1 16.65,5.024 Q2.3
NetP3_1: P3.1 Q3.3 | length 4.2
  Bottom Layer w0.254: P3.1 28,5.043 Q3.3
NetP5_1: P5.1 Q4.3 | length 4.2
  Bottom Layer w0.254: Q4.3 39.2,5.007 P5.1
NetP6_1: P6.1 Q5.3 | length 4.2
  Bottom Layer w0.254: P6.1 50.6,4.98 Q5.3
NetP7_1: P7.1 Q6.3 | length 4.6
  Bottom Layer w0.254: P7.1 63,6.048 Q6.3
NetP8_1: P8.1 Q7.3 | length 4.2
  Bottom Layer w0.254: Q7.3 73.2,5.001 P8.1
NetP9_1: P9.1 Q8.3 | length 4.2
  Bottom Layer w0.254: P9.1 84.6,4.985 Q8.3
NetP10_1: P10.1 Q9.3 | length 4.2
  Bottom Layer w0.254: Q9.3 95.9,4.964 P10.1
NetP11_1: P11.1 Q10.3 | length 4.2
  Bottom Layer w0.254: Q10.3 107.2,4.996 P11.1
NetP12_1: P12.1 Q11.3 | length 4.2
  Bottom Layer w0.254: Q11.3 118.5,5.027 P12.1
NetP13_1: P13.1 Q12.3 | length 6.5
  Bottom Layer w0.254: Q12.3 118.8,56.085 118.973,56.258 120.458,56.258 122.713,58.513 P13.1
NetP14_1: P14.1 Q13.3 | length 4
  Bottom Layer w0.254: P14.1 111.4,59.841 Q13.3
NetP15_1: P15.1 Q14.3 | length 4
  Bottom Layer w0.254: P15.1 100.1,59.809 Q14.3
NetP16_1: P16.1 Q15.3 | length 4
  Bottom Layer w0.254: Q15.3 88.7,59.84 P16.1
NetP17_1: P17.1 Q16.3 | length 4
  Bottom Layer w0.254: P17.1 77.5,59.746 Q16.3
NetP18_1: P18.1 Q17.3 | length 4
  Bottom Layer w0.254: P18.1 66.1,59.815 Q17.3
NetP19_1: P19.1 Q18.3 | length 4
  Bottom Layer w0.254: Q18.3 54.7,59.835 P19.1
NetP20_1: P20.1 Q19.3 | length 4
  Bottom Layer w0.254: P20.1 43.4,59.852 Q19.3
NetP21_1: P21.1 Q20.3 | length 4
  Bottom Layer w0.254: P21.1 32.1,59.82 Q20.3
NetP22_1: P22.1 Q21.3 | length 4
  Bottom Layer w0.254: Q21.3 20.7,59.829 P22.1
NetP23_1: P23.1 Q22.3 | length 4.6
  Bottom Layer w0.254: 9.3,55.29 9.3,59.761 P23.1
NetP24_1: P24.1 Q23.3 | length 5
  Bottom Layer w0.254: Q23.3 119.1,21.5 120.1,20.5 122.16,20.5 P24.1
NetQ1_1: Q1.1 R1.1 | length 6.4
  Bottom Layer w0.7: R1.1 4,13.4 4,12.4 4.9,11.5 Q1.1@5.9,11.5
NetQ2_1: Q2.1 R2.1 | length 2.4
  Bottom Layer w0.8: R2.1 13.6,11.969 14.069,11.5 Q2.1@15.5,11.5
NetQ3_1: Q3.1 R3.1 | length 3
  Bottom Layer w0.8: R3.1 24.3,12.1 24.3,11.969 24.769,11.5 Q3.1@26.8,11.5
NetQ4_1: Q4.1 R4.1 | length 2.7
  Bottom Layer w0.8: R4.1 36.05,12.3 36.15,12.2 36.15,11.969 36.619,11.5 Q4.1@38,11.5
NetQ5_1: Q5.1 R5.1 | length 2.9
  Bottom Layer w0.8: R5.1 47.25,12.3 47.35,12.2 47.35,11.969 47.819,11.5 Q5.1@49.4,11.5
NetQ6_1: Q6.1 R6.1 | length 2.3
  Bottom Layer w0.8: R6.1 60.25,12.3 60.35,12.2 60.35,11.969 60.819,11.5 Q6.1@61.8,11.5
NetQ7_1: Q7.1 R7.1 | length 2.8
  Bottom Layer w0.8: R7.1 69.95,12.3 70.05,12.2 70.05,12.069 70.519,11.6 Q7.1@72.15,11.6
NetQ8_1: Q8.1 R8.1 | length 3.7
  Bottom Layer w0.8: R8.1 80.2,12.2 80.3,12.1 80.3,11.969 80.769,11.5 Q8.1@83.4,11.5
NetQ9_1: Q9.1 R9.1 | length 3.1
  Bottom Layer w0.8: R9.1 92.15,12.3 92.95,11.5 Q9.1@94.7,11.5
NetQ10_1: Q10.1 R10.1 | length 4.4
  Bottom Layer w0.8: R10.1 102.1,11.969 102.569,11.5 Q10.1@106,11.5
NetQ11_1: Q11.1 R24.1 | length 2.5
  Bottom Layer w0.8: R24.1 115.5,12.2 115.5,11.969 115.969,11.5 117.382,11.5 Q11.1@117.442,11.44
NetQ12_1: Q12.1 R11.1 | length 3.4
  Bottom Layer w1: Q12.1 121.39,53.51 121.75,53.15 121.75,52.1 R11.1
NetQ13_1: Q13.1 R12.1 | length 4.4
  Bottom Layer w0.8: Q13.1 115.031,53.51 115.031,52.1 115.131,52 R12.1
NetQ14_1: Q14.1 R13.1 | length 3.9
  Bottom Layer w0.8: Q14.1 103.231,53.51 103.35,53.391 103.35,52.2 103.45,52.1 R13.1
NetQ15_1: Q15.1 R14.1 | length 5.3
  Bottom Layer w0.8: Q15.1 93.231,53.51 93.35,53.391 93.35,52.2 93.45,52.1 R14.1
NetQ16_1: Q16.1 R15.1 | length 3.9
  Bottom Layer w0.8: Q16.1 80.631,53.51 80.75,53.391 80.75,52.2 80.85,52.1 R15.1
NetQ17_1: Q17.1 R16.1 | length 4
  Bottom Layer w0.8: Q17.1 69.331,53.51 69.45,53.391 69.45,52.2 69.55,52.1 R16.1
NetQ18_1: Q18.1 R17.1 | length 3.5
  Bottom Layer w0.8: Q18.1 57.531,53.51 57.65,53.391 57.65,52.3 57.75,52.2 R17.1
NetQ19_1: Q19.1 R18.1 | length 3.6
  Bottom Layer w0.8: Q19.1 46.131,53.51 46.25,53.391 46.25,52.1 46.35,52 R18.1
NetQ20_1: Q20.1 R19.1 | length 3.7
  Bottom Layer w0.8: Q20.1 35.031,53.51 35.25,53.291 35.25,52.3 35.35,52.2 R19.1
NetQ21_1: Q21.1 R20.1 | length 3.9
  Bottom Layer w1: Q21.1 23.714,53.51 24.05,53.174 24.05,52.1 R20.1
NetQ22_1: Q22.1 R21.1 | length 3.5
  Bottom Layer w0.8: Q22.1 12.131,53.51 12.25,53.391 12.25,52.3 12.35,52.2 R21.1
NetQ23_1: Q23.1 R22.1 | length 2.9
  Bottom Layer w0.8: R22.1 114.641,19.2 115.11,19.669 115.11,20.2
NetRV_2: RV.2 U1.GP28_A2 | length 50
  Bottom Layer w0.8: U1.GP28_A2 68.13,39.769 68.599,39.3 104,39.3 104.7,40 104.7,45.637 106.663,47.6 RV.2
pads on no net: RV. U1.3V3_EN U1.ADC_VREF U1.AGND U1.GND2 U1.GND3 U1.GND4 U1.GND5 U1.GND6 U1.GND7 U1.RUN U1.VBUS
copper on no net:
  other v1: 9.9,21.1 118.6,45.5

## Polygon pours and split planes (outlines as drawn)
NetC1_2 on Bottom Layer "NETC1_2_L02_P069" (hatched 45Degree grid 0.35 track 0.203, pour order 69): 194 vertices, not listed, extent 0.8,1 125.8,64
NetP24_1 on Bottom Layer "NETP24_1_L02_P068" (solid, pour order 68): 117,21.2 117,21.8 122.8,21.8 123.1,21.5 123.1,19.6 118.6,19.6
NetP7_1 on Bottom Layer "NETP7_1_L02_P067" (solid, pour order 67): 62.7,9.7 63.3,9.7 63.3,4.5 62.9,4.1 61,4.1 61,8
NetP12_1 on Bottom Layer "NETP12_1_L02_P066" (solid, pour order 66): 117.684,4.1 119.384,4.1 119.384,9.2 118.884,9.7 118.284,9.7 117.684,9.1
NetP11_1 on Bottom Layer "NETP11_1_L02_P065" (solid, pour order 65): 106.352,4.1 108.052,4.1 108.052,9.2 107.552,9.7 106.952,9.7 106.352,9.1
NetP10_1 on Bottom Layer "NETP10_1_L02_P064" (solid, pour order 64): 95.021,4.1 96.721,4.1 96.721,9.2 96.221,9.7 95.621,9.7 95.021,9.1
NetP9_1 on Bottom Layer "NETP9_1_L02_P063" (solid, pour order 63): 83.689,4.1 85.389,4.1 85.389,9.2 84.889,9.7 84.289,9.7 83.689,9.1
NetP8_1 on Bottom Layer "NETP8_1_L02_P062" (solid, pour order 62): 72.358,4.1 74.058,4.1 74.058,9.2 73.558,9.7 72.958,9.7 72.358,9.1
NetP6_1 on Bottom Layer "NETP6_1_L02_P061" (solid, pour order 61): 49.694,4.1 51.394,4.1 51.394,9.2 50.894,9.7 50.294,9.7 49.694,9.1
NetP5_1 on Bottom Layer "NETP5_1_L02_P060" (solid, pour order 60): 38.363,4.1 40.063,4.1 40.063,9.2 39.563,9.7 38.963,9.7 38.363,9.1
NetP3_1 on Bottom Layer "NETP3_1_L02_P059" (solid, pour order 59): 27.032,4.1 28.732,4.1 28.732,9.2 28.232,9.7 27.632,9.7 27.032,9.1
NetP2_1 on Bottom Layer "NETP2_1_L02_P058" (solid, pour order 58): 15.7,4.1 17.4,4.1 17.4,9.2 16.9,9.7 16.3,9.7 15.7,9.1
NetP22_1 on Bottom Layer "NETP22_1_L02_P057" (solid, pour order 57): 21.03,55.318 21.63,55.918 21.63,60.718 19.83,60.718 19.83,55.918 20.43,55.318
NetP21_1 on Bottom Layer "NETP21_1_L02_P056" (solid, pour order 56): 32.388,55.196 32.988,55.796 32.988,60.596 31.188,60.596 31.188,55.796 31.788,55.196
NetP20_1 on Bottom Layer "NETP20_1_L02_P055" (solid, pour order 55): 43.7,55.311 44.3,55.911 44.3,60.711 42.5,60.711 42.5,55.911 43.1,55.311
NetP19_1 on Bottom Layer "NETP19_1_L02_P054" (solid, pour order 54): 55.024,55.318 55.624,55.918 55.624,60.718 53.824,60.718 53.824,55.918 54.424,55.318
NetP18_1 on Bottom Layer "NETP18_1_L02_P053" (solid, pour order 53): 66.4,55.274 67,55.874 67,60.674 65.2,60.674 65.2,55.874 65.8,55.274
NetP17_1 on Bottom Layer "NETP17_1_L02_P052" (solid, pour order 52): 77.687,55.318 78.287,55.918 78.287,60.718 76.487,60.718 76.487,55.918 77.087,55.318
NetP16_1 on Bottom Layer "NETP16_1_L02_P051" (solid, pour order 51): 89.019,55.318 89.619,55.918 89.619,60.718 87.819,60.718 87.819,55.918 88.419,55.318
NetP15_1 on Bottom Layer "NETP15_1_L02_P050" (solid, pour order 50): 100.375,55.293 100.975,55.893 100.975,60.693 99.175,60.693 99.175,55.893 99.775,55.293
NetP14_1 on Bottom Layer "NETP14_1_L02_P049" (solid, pour order 49): 111.7,55.3 112.3,55.9 112.3,60.7 110.5,60.7 110.5,55.9 111.1,55.3
NetP13_1 on Bottom Layer "NETP13_1_L02_P048" (solid, pour order 48): 118.5,55.3 118.5,56.6 121.9,60 121.9,60.7 123.8,60.7 124,60.5 124,56.4 122.9,55.3
NetP1_1 on Bottom Layer "NETP1_1_L02_P025" (solid, pour order 25): 4.4,4.1 4.4,7.4 6.8,9.8 7.5,9.8 7.5,5.5 6.1,4.1
NetP23_1 on Bottom Layer "NETP23_1_L02_P001" (solid, pour order 1): 9,54.7 8.6,55.1 8.6,60.7 10.3,60.7 10.3,55 10,54.7

## Silkscreen, mask and mechanical layers (free items; w line width, h text height)
Top Overlay:
  text "+" at 95.446,55.5 h1.52 r180
  text "+" at 50.146,55.4 h1.52 r180
  text "+" at 83.946,55.3 h1.52 r180
  text "+" at 4.346,55.2 h1.52 r180
  text "-" at 9.746,55.208 h1.52 r180
  text "+" at 38.746,55.2 h1.52 r180
  text "-" at 89.346,55.208 h1.52 r180
  text "-" at 100.246,55.208 h1.52 r180
  text "+" at 106.846,55.2 h1.52 r180
  text "+" at 27.546,55.1 h1.52 r180
  text "-" at 43.946,55.108 h1.52 r180
  text "-" at 55.146,55.108 h1.52 r180
  text "+" at 61.346,55.1 h1.52 r180
  text "-" at 66.346,55.108 h1.52 r180
  text "+" at 72.746,55.1 h1.52 r180
  text "-" at 111.946,55.108 h1.52 r180
  text "+" at 118.346,55.1 h1.52 r180
  text "+" at 16.046,55 h1.52 r180
  text "-" at 32.546,55.008 h1.52 r180
  text "-" at 77.646,55.008 h1.52 r180
  text "-" at 123.646,55.008 h1.52 r180
  text "-" at 21.146,54.908 h1.52 r180
  text "S23" at 9.5,52.4 h2 r180
  text "S22" at 20.7,52.4 h2 r180
  text "S21" at 31.9,52.4 h2 r180
  text "S20" at 43.8,52.4 h2 r180
  text "S19" at 54.7,52.4 h2 r180
  text "S18" at 66.3,52.4 h2 r180
  text "S17" at 77.2,52.4 h2 r180
  text "S16" at 88.8,52.4 h2 r180
  text "S15" at 100.1,52.4 h2 r180
  text "S14" at 111.3,52.4 h2 r180
  text "S13" at 122.9,52.3 h2 r180
  text "+" at 107.4,39.683 h0.7
  text "D" at 110,39.7 h0.7
  text "-" at 112.6,39.65 h0.7
  text "12V IN" at 1.2,38.5 h1.2
  text "+" at 9.754,34.3 h1.52
  text "-" at 10.808,29.454 h1.52 r90
  text "S12" at 123.2,29.4 h2 r90
  text "D" at 109.9,28.4 h0.7
  text "+" at 107.3,28.383 h0.7
  text "-" at 112.5,28.35 h0.7
  text "-" at 116.008,25.054 h1.52 r90
  text "+" at 114.854,19 h1.52
  text "STEP CONTROLLER V1.2" at 38.2,18.7 h1.5 r90
  text "S1" at 6.4,12.2 h2
  text "S2" at 17.6,12.2 h2
  text "S3" at 28.8,12.2 h2
  text "S5" at 51.3,12.2 h2
  text "S9" at 96.4,12.2 h2
  text "S10" at 107.2,12.2 h2
  text "S11" at 118.6,12.2 h2
  text "S6" at 62.8,12.1 h2
  text "S4" at 40.65,12.09 h2
  text "S8" at 86.05,12 h2
  text "S7" at 74,11.9 h2
  text "+" at 32.454,9.9 h1.52
  text "+" at 66.354,9.9 h1.52
  text "+" at 43.854,9.8 h1.52
  text "+" at 54.954,9.8 h1.52
  text "+" at 77.754,9.8 h1.52
  text "+" at 89.254,9.8 h1.52
  text "+" at 100.454,9.8 h1.52
  text "+" at 123.454,9.8 h1.52
  text "+" at 9.854,9.7 h1.52
  text "+" at 21.254,9.7 h1.52
  text "-" at 27.254,9.692 h1.52
  text "-" at 61.454,9.692 h1.52
  text "-" at 95.554,9.692 h1.52
  text "-" at 117.854,9.692 h1.52
  text "-" at 38.354,9.592 h1.52
  text "-" at 49.754,9.592 h1.52
  text "-" at 72.654,9.592 h1.52
  text "-" at 83.654,9.592 h1.52
  text "+" at 111.954,9.5 h1.52
  text "-" at 4.754,9.392 h1.52
  text "-" at 16.054,9.392 h1.52
  text "-" at 106.954,9.392 h1.52
Mechanical 15:
  lines w0.15: 0,0 0,65 126.7,65 126.7,0 125.8,0 0,0

## Text inside footprints (layer, text, board x,y; h text height)
U1: Top Overlay "RPI PICO" at 53.4,45.2 h1.27